# Altium PCB PCB1.PcbDoc
Units mm, origin at the board's own origin, x right, y up, seen from the top; angles counter-clockwise.
Board outline 45.67 x 59.21 mm, 2 copper layers (Top Layer, Bottom Layer); 30 components, 37 nets, 106 pads, 16 vias.
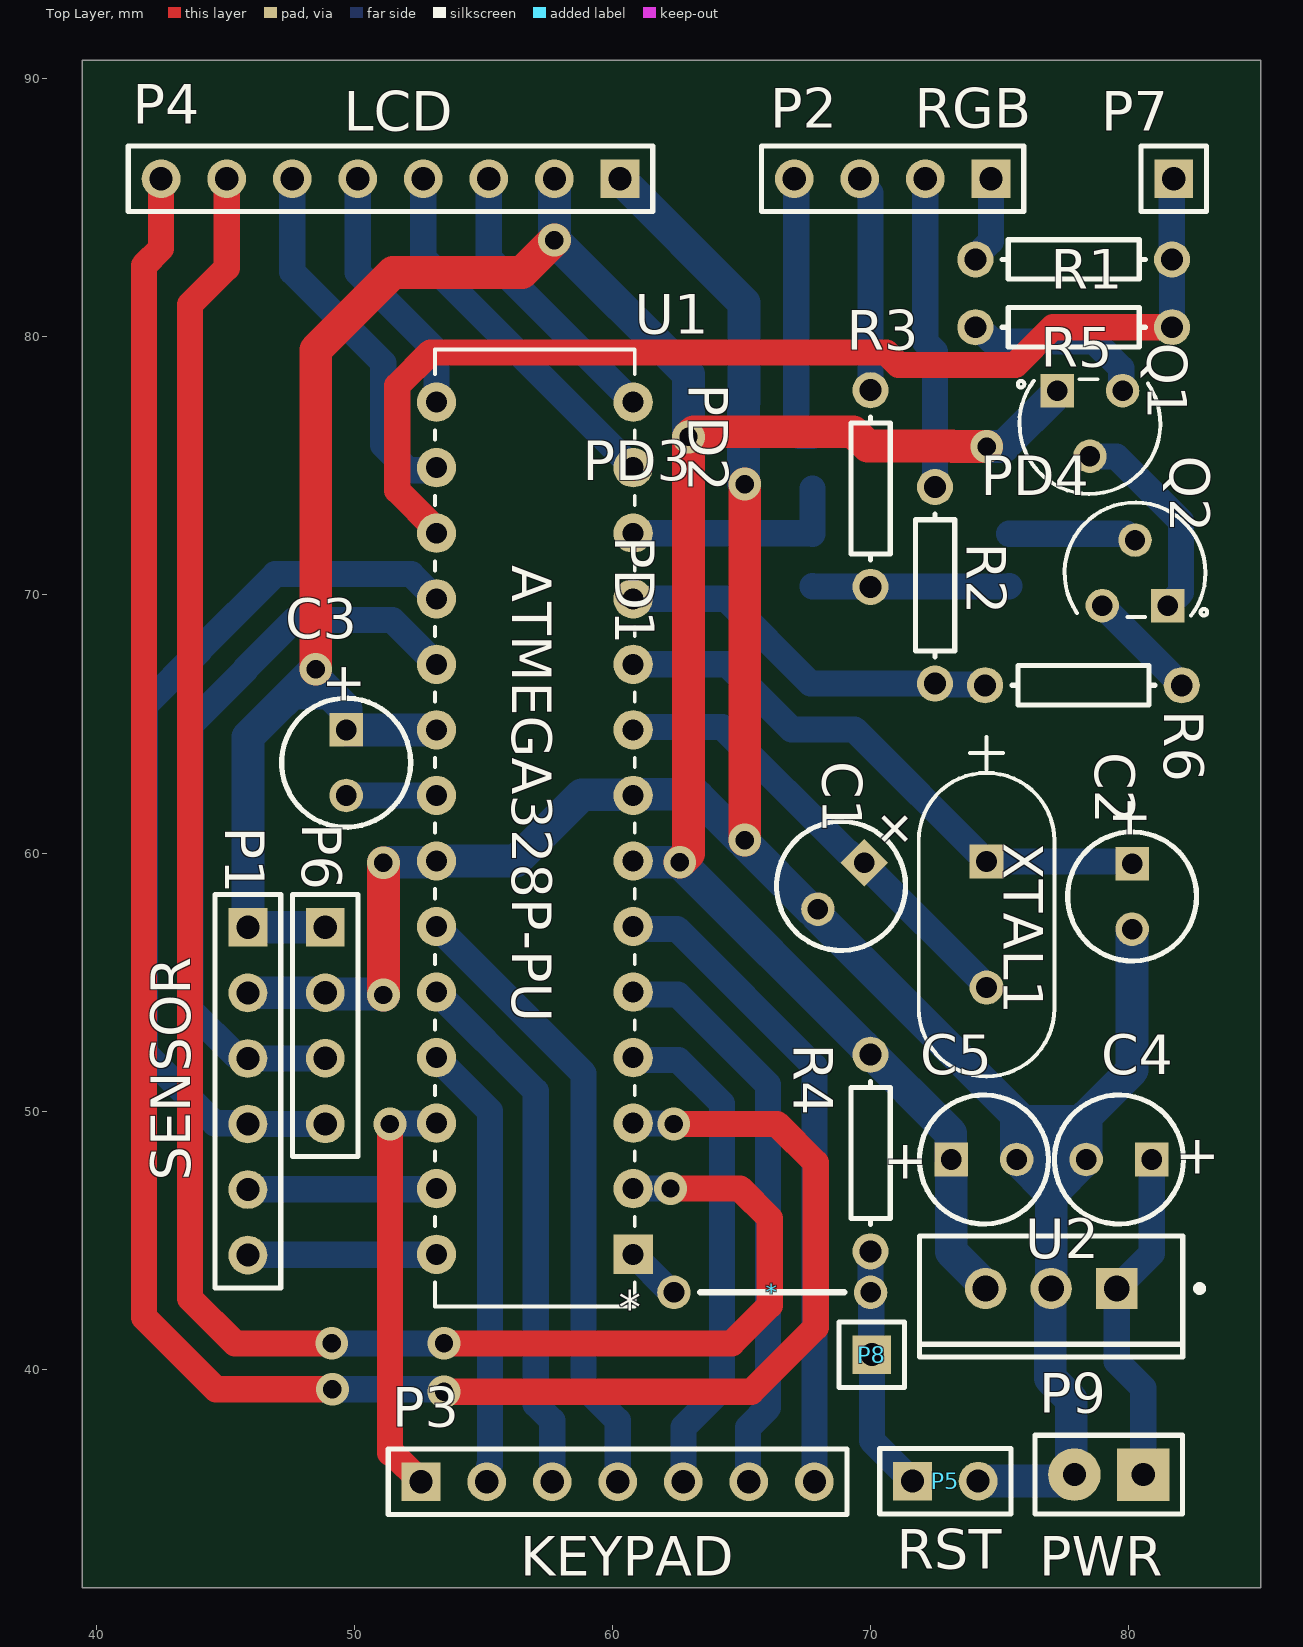
[diagram p0: Top Layer view]
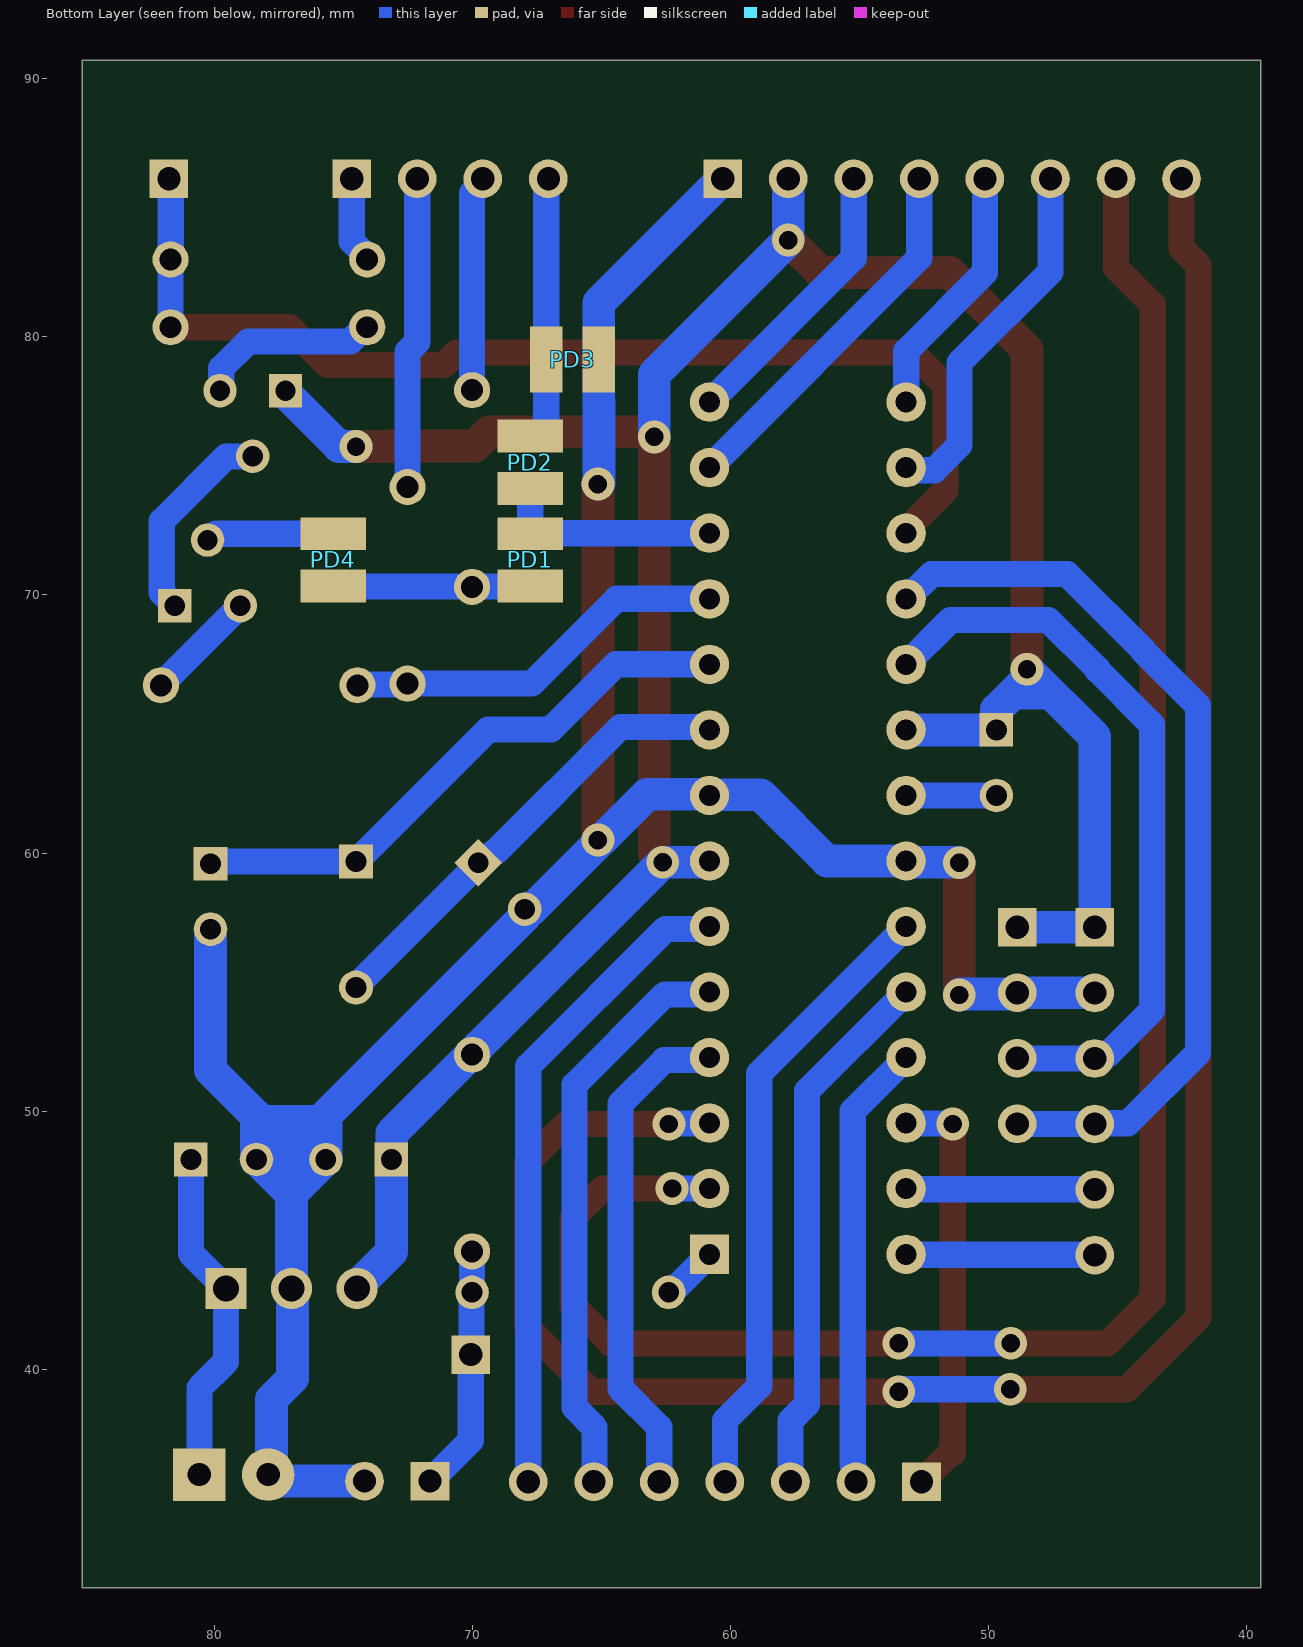
[diagram p1: Bottom Layer view, seen from below]
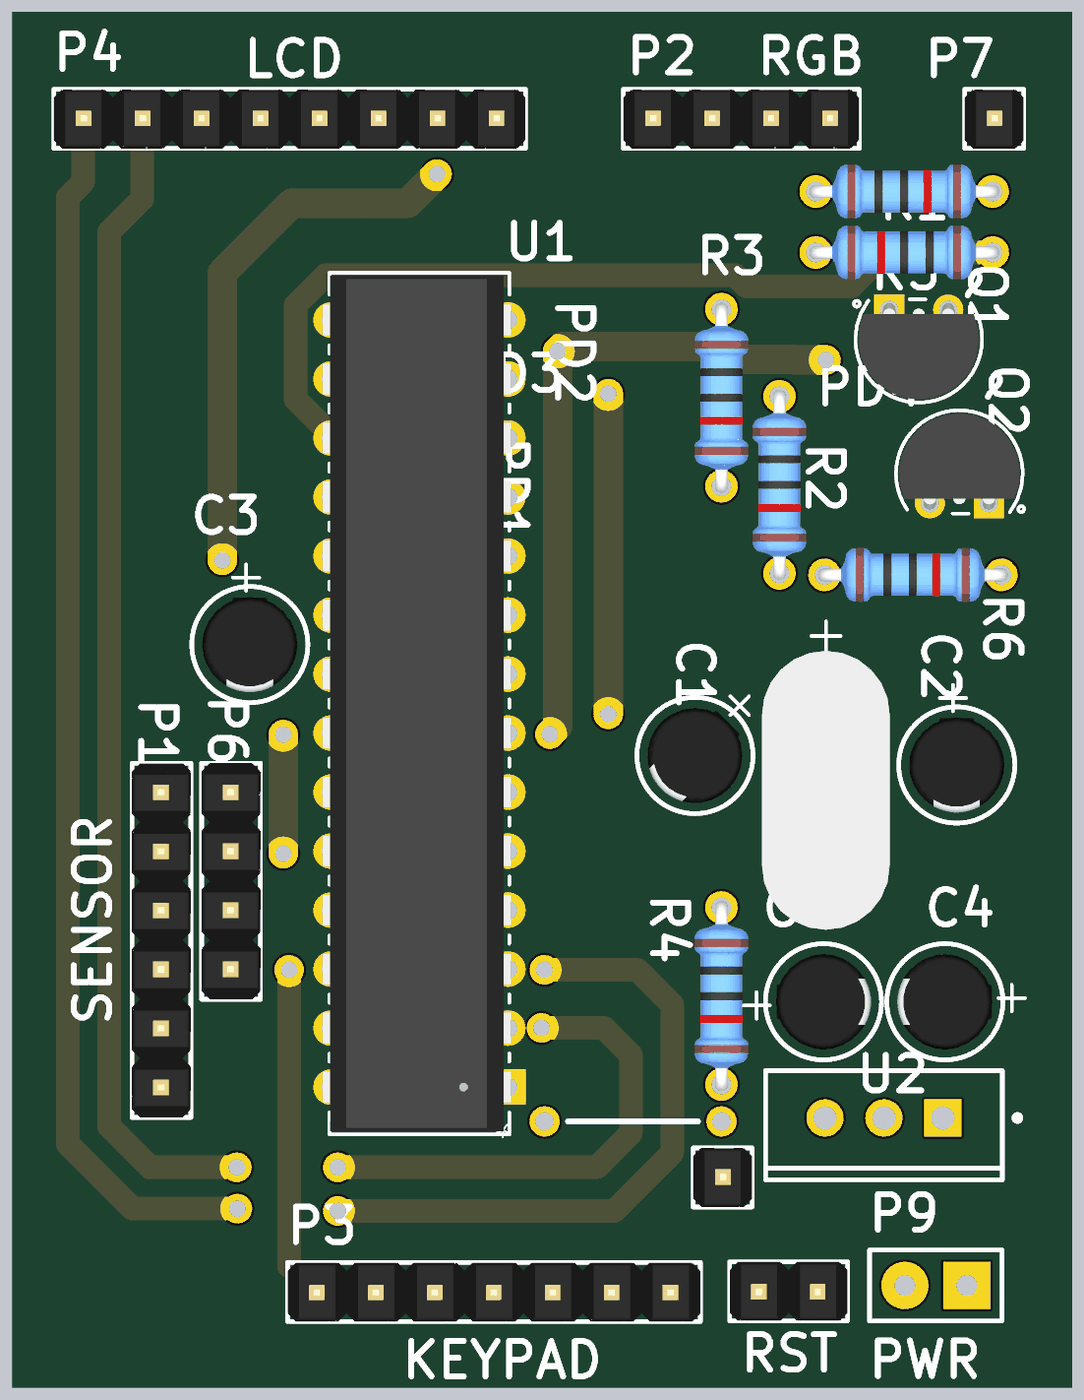
[diagram p2: 3D render of the assembled board from above, using the file's embedded part models]

## Layer stack, top to bottom
Top Solder: solder mask 0.0102, Solder Resist, Dk 3.5
Top Layer: signal copper 0.0356
Dielectric 1: dielectric 0.32, FR-4, Dk 4.8
Bottom Layer: signal copper 0.0356
Bottom Solder: solder mask 0.0102, Solder Resist, Dk 3.5

## Board outline
39.446,31.521 85.115,31.521 85.115,90.729 39.446,90.729

## Design rules (kind name [scope] priority, off if disabled: settings)
Clearance [All] p1: gap=0.254 ignorepadtopadclearanceinfootprint=FALSE except(0: Arc-Hole Track-Hole SMDPad-Hole THPad-Hole Via-Hole Fill-Hole Poly-Hole Region-Hole Text-Hole; 0.762: Arc-Arc Arc-Track Arc-Fill Arc-Poly Arc-Region Track-Track Track-Fill Track-Poly Track-Region)
PolygonConnect [All] p1: connectstyle=Relief reliefconductorwidth=0.254 reliefentries=4 polygonreliefangle="90 Angle" airgapwidth=0.254
RoomDefinition Sheet1 [InComponentClass('Sheet1')] p1 off: confinementstyle=ConfineIn formatcopy=TRUE lockcomponents=FALSE outline 39.243,31.42 85.217,31.42 85.217,90.729 39.243,90.729
RoutingVias [All] p1: holewidth=0.711 width=1.27 viastyle="Through Hole" minholewidth=0.711 minwidth=1.27 maxholewidth=0.711 maxwidth=1.27
SolderMaskExpansion [All] p1: expansion=0.102 istentingtop=FALSE
Width Width_POW [InNet('+5')  or InNet('GND')] p1: maxlimit=1.524 minlimit=0.762 preferedwidth=1.27 minimp=50.000000 maximp=50.000000 favimp=50.000000
Width [All] p2: maxlimit=1.524 minlimit=0.762 preferedwidth=1.016 minimp=50.000000 maximp=50.000000 favimp=50.000000
30 further rules are at their usual default settings.

## Components (designator, comment, footprint, x,y, rotation, side; value= is the part's Value field where it differs from the comment)
* "Jumper3" JUMPER3 66.192,42.977 r180 top
C1 "100pF" CAP1 68.859,58.725 r225 top
C2 "100pF" CAP1 80.137,58.318 r270 top
C3 "100pF" CAP1 49.682,63.5 r270 top
C4 "100pF" CAP1 79.625,48.125 r180 top
C5 "100pF" CAP1 74.395,48.125 r0 top
P1 "SENSOR" H6 45.875,57.12 r270 top
P2 "RGB" H4 74.665,86.125 r180 top
P3 "KEYPAD" H7 52.585,35.634 r0 top
P4 "LCD" H8 60.29,86.125 r180 top
P5 "RST" H2 71.628,35.662 r0 top
P6 "ISP1" H4 48.875,57.125 r270 top
P7 "ISP2" H1 81.75,86.125 r180 top
P8 "ISP3" H1 70.053,40.564 r180 top
P9 "PWR" H2_PWR 80.569,35.916 r180 top
PD1 "Pad2" PAD2 67.75,72.375 r270 top
PD2 "Pad2" PAD2 67.75,74.125 r90 top
PD3 "Pad2" PAD2 65.093,79.125 r0 top
PD4 "Pad2" PAD2 75.375,70.343 r90 top
Q1 "A733" TO-92_ONS 79.77,77.915 r180 top
Q2 "A733" TO-92_ONS 78.98,69.585 r0 top
R1 "220R" RES 77.875,83 r180 top
R2 "220R" RES 72.5,70.375 r90 top
R3 "220R" RES 70,74.125 r90 top
R4 "10K" RES 70,48.375 r90 top
R5 "1K" RES 77.875,80.375 r0 top
R6 "1K" RES 78.25,66.5 r180 top
U1 "ATMEGA328P-PU" 28P3_ATM 60.801,44.452 r180 top
U2 "LM7805CT" FAIR-TO-220-3 77,43.125 r270 top
XTAL1 "16MHz" XTAL_9B_TXC 74.498,59.668 r270 top

## Footprints (in the part's own frame and the unit in brackets; to place one, negate y for a bottom-side part, rotate by r counter-clockwise, add the part's x,y. Pads: shape width x height; smd on the part's side, far side on the other; paste and mask are expansions set on the pad)
28P3_ATM [mil]
  rect 60x60 hole 32 mask+0: 1(0,0)
  round 60 hole 32 mask+0: 2(0,-100) 3(0,-200) 4(0,-300) 5(0,-400) 6(0,-500) 7(0,-600) 8(0,-700) 9(0,-800) 10(0,-900) 11(0,-1000) 12(0,-1100) 13(0,-1200) 14(0,-1300) 15(300,-1300) 16(300,-1200) 17(300,-1100) 18(300,-1000) 19(300,-900) 20(300,-800) 21(300,-700) 22(300,-600) 23(300,-500) 24(300,-400) 25(300,-300) 26(300,-200) 27(300,-100) 28(300,0)
  silkscreen extent -3,-1380 303,80, body extent -5,-1375 314,75, height 205
CAP1 [mm] "THD, 2-Leads, Dia 5mm, Body Length 11mm"
  rect 1.3x1.3 hole 0.8: 1(-1.27,0)
  round 1.3 hole 0.8: 2(1.27,0)
  silkscreen extent -2.5,-2.5 2.5,2.5, body extent -2.05,-2.05 2.05,2.05, height 8.1
FAIR-TO-220-3 [mm] "FM, 3-Leads, Body 10.2x4.7mm, Pitch 2.54mm"
  rect 1.6x1.6 hole 1: 1(0,2.54)
  round 1.6 hole 1: 2(0,0) 3(0,-2.54)
  silkscreen extent -2.04,-5.1 2.66,5.88, body extent -2.04,-5.1 2.66,5.1, height 18.95
H1 [mm] "Connector; Header; 1 Position"
  rect 1.5x1.5 hole 0.9: 1(0,0)
  silkscreen extent -1.27,-1.27 1.27,1.27, body extent -1.27,-1.27 1.27,1.27, height 9.2
H2 [mm] "Connector; Header; 2 Position"
  rect 1.5x1.5 hole 0.9: 1(0,0)
  round 1.5 hole 0.9: 2(2.54,0)
  silkscreen extent -1.27,-1.27 3.81,1.27, body extent -1.27,-1.27 3.81,1.27, height 9.2
H2_PWR [mil] "Connector; Header; 2 Position"
  rect 80x80 hole 35.43: 1(0,0)
  round 80 hole 35.43: 2(105,0)
  silkscreen extent -60,-60 165,60
H4 [mm] "Connector; Header; 4 Position"
  rect 1.5x1.5 hole 0.9: 1(0,0)
  round 1.5 hole 0.9: 2(2.54,0) 3(5.08,0) 4(7.62,0)
  silkscreen extent -1.27,-1.27 8.89,1.27, body extent -1.27,-1.27 8.89,1.27, height 9.2
H6 [mm] "Connector; Header; 6 Position"
  rect 1.5x1.5 hole 0.9: 1(0,0)
  round 1.5 hole 0.9: 2(2.54,0) 3(5.08,0) 4(7.62,0) 5(10.16,0) 6(12.7,0)
  silkscreen extent -1.27,-1.27 13.97,1.27, body extent -1.27,-1.27 13.97,1.27, height 9.2
H7 [mm] "Connector; Header; 7 Position"
  rect 1.5x1.5 hole 0.9: 1(0,0)
  round 1.5 hole 0.9: 2(2.54,0) 3(5.08,0) 4(7.62,0) 5(10.16,0) 6(12.7,0) 7(15.24,0)
  silkscreen extent -1.27,-1.27 16.51,1.27, body extent -1.27,-1.27 16.51,1.27, height 9.2
H8 [mm] "Connector; Header; 8 Position"
  rect 1.5x1.5 hole 0.9: 1(0,0)
  round 1.5 hole 0.9: 2(2.54,0) 3(5.08,0) 4(7.62,0) 5(10.16,0) 6(12.7,0) 7(15.24,0) 8(17.78,0)
  silkscreen extent -1.27,-1.27 19.05,1.27, body extent -1.27,-1.27 19.05,1.27, height 9.2
JUMPER3 [mm]
  round 1.3 hole 0.8: 1(-3.81,0) 2(3.81,0)
  silkscreen extent -2.79,0 2.79,0
PAD2 [mil]
  rect 50x100 smd far side: 1(0,0) 2(80,0)
RES [mm] "Axial Device, Thru-Hole; 2 Leads; 0.3 in Pin Spacing"
  round 1.4 hole 0.85: 1(-3.81,0) 2(3.81,0)
  silkscreen extent -2.77,-0.76 2.77,0.76, body extent -4.08,-1.17 4.08,1.17, height 2.44
TO-92_ONS [mil]
  rect 51x51 hole 31 mask+0: 1(100,0)
  round 51 hole 31 mask+0: 2(50,100) 3(0,0)
  silkscreen extent -57,-17 160,157, body extent -52,-11 152,153, height 300
XTAL_9B_TXC [mil]
  rect 52x52 hole 32 mask+0: 1(0,0)
  round 52 hole 32 mask+0: 2(192.13,0)
  silkscreen extent -190,-104 328,104, body extent -140,-108 332,108, height 145

## Part data
C1 C2 C3 C4 C5: library part Cap1, "Capacitor", PackageDescription="Capacitor; 2 Leads", PackageReference=CAPR5-4X5, Published=23-Sep-2002, Publisher="Altium Limited"
P1: library part "Header 6", "Header, 6-Pin", LatestRevisionDate=17-Jul-2002, LatestRevisionNote="Re-released for DXP Platform.", Publisher="Altium Limited"
P2 P6: library part "Header 4", "Header, 4-Pin", LatestRevisionDate=17-Jul-2002, LatestRevisionNote="Re-released for DXP Platform.", Publisher="Altium Limited"
P3: library part "Header 7", "Header, 7-Pin", LatestRevisionDate=17-Jul-2002, LatestRevisionNote="Re-released for DXP Platform.", Publisher="Altium Limited"
P4: library part "Header 8", "Header, 8-Pin", LatestRevisionDate=17-Jul-2002, LatestRevisionNote="Re-released for DXP Platform.", Publisher="Altium Limited"
P5 P9: library part "Header 2", "Header, 2-Pin", LatestRevisionDate=17-Jul-2002, LatestRevisionNote="Re-released for DXP Platform.", Publisher="Altium Limited"
P7 P8: library part "Header 1", "Header, 1-Pin", LatestRevisionDate=17-Jul-2002, LatestRevisionNote="Re-released for DXP Platform.", Publisher="Altium Limited"
PD1 PD2 PD3 PD4: "Square Pad", h=10mil
Q1 Q2: "PNP General Purpose Transistor", ComponentLink1Description="Manufacturer Link", ComponentLink1URL=http://www.fairchildsemi.com/, ComponentLink2Description=Datasheet, ComponentLink2URL=http://www.fairchildsemi.com/ds/2N%2F2N3906.pdf, DatasheetVersion=1997, LatestRevisionDate=15-Jan-2003, LatestRevisionNote="PCB Footprint 'BCY-W3/D4.7' replaced", PackageDescription="TO, Flat Index; 3 In-Line, Axial Leads; Body Dia. 4.5mm; Leads 0.51 x 0.48 mm (max)", PackageReference=TO-92A, PackageVersion=Sep-1998, Published=8-Jun-2000, Publisher="Altium Limited"
R1 R2 R3 R4 R5 R6: library part Res1, "Resistor", LatestRevisionDate=17-Jul-2002, LatestRevisionNote="Re-released for DXP Platform.", PackageDescription="Axial Device, Thru-Hole; 2 Leads; 0.3 in Pin Spacing", PackageReference=AXIAL-0.3, Published=8-Jun-2000, Publisher="Altium Limited"
U1: "No Description Available", Built_By=EMA_UL_Team, Copyright="Copyright (C) 2018 Accelerated Designs. All rights reserved", Manufacturer_Part_Number=ATMEGA328P-PU, RefDes=RefDes, SourceLibrary=Atmel_2011-04-02, Type=DEV, Vendor=Atmel
U2: library part CMP-2000-04938-1, "Positive Voltage Regulator, 5 V, 1 A, -40 to 125 degC, 3-Pin TO-220, RoHS, Tube", Manufacturer=FairchildSemiconductor, Maximum Input Voltage=35V, Maximum Output Current=2.2(Typ)A, Maximum Quiescent Current=8mA, Operating Temperature=-40to125degC, Output Voltage=5V, Package=3TO-220AB, Package Description="3-Pin Through Hole Device, Body 10 x 4.5 mm, Pitch 2.54 mm", Package Reference=TO-220, Typical Dropout Voltage @ Current=2@1AV, Accuracy=±4%, Category=LinearRegulator, Datasheet URL=https://datasheet.ciiva.com/26904/lm7805ct-26904988.pdf, Datasheet Version=Aug-12, Line Regulation=100mV, Load Regulation=100mV, Manufacturer URL=https://www.fairchildsemi.com/, Mounting=ThroughHole, Number of Outputs=1, Output Type=Fixed, Package URL=https://www.fairchildsemi.com/package-drawings/TO/TO220B03.pdf, Packaging=Rail/Tube, Polarity=Positive, Rad Hard=No, Type=Linear
XTAL1: library part 9B-11.0592MAAJ-B, "No Description Available", Built_By=EMA_Cory, Copyright="Copyright (C) 2018 Accelerated Designs. All rights reserved", Datasheet=http://www.txccrystal.com/images/pdf/9b.pdf, Manufacturer_Part_Number=9B-11.0592MAAJ-B, RefDes=RefDes, SourceLibrary=TXC_2020-02-10, Type=DEV, Vendor=TXC

## Via types
v1: diameter 1.27, hole 0.711, Top Layer to Bottom Layer, 16 vias

## Nets (pads, with @x,y where several pads share a name; then routed paths per layer and width w, separated by ;. In a path a pad name is that pad's centre, name@x,y a point inside that pad or via, vN(x,y) a via of type N, cw(c..) or ccw(c..) an arc to the next point about the centre after c; other vN are vias at no path point)
+5: C3.1 C5.1 P1.1 P4.2 P6.1 Q1.1 R4.2 U1.7 U1.20 U2.3 | length 111.4
  Top Layer w1.27: v1(48.5,67.125) 48.5,79.5 51.5,82.5 56.5,82.5 v1(57.75,83.75) ; v1(62.611,59.643) 62.944,59.977 v1(62.944,76.125) 63.148,76.329 69.334,76.329 69.889,75.774 73.159,75.774 73.183,75.75 v1(74.5,75.75)
  Bottom Layer w1.27: P6.1 48.872,57.122 45.877,57.122 P1.1 45.875,64.5 v1(48.5,67.125) 48.5,66.74 49.682,65.557 C3.1 C3.1 53.18,64.771 U1.20 ; P4.2 v1(57.75,83.75) 62.944,78.556 v1(62.944,76.125) ; U1.7 60.85,59.643 v1(62.611,59.643) 69.73,52.524 73.11,49.144 73.11,48.14 C5.1 73.125,44.549 74.46,43.214 U2.3 ; v1(74.5,75.75) 75.156,75.75 77.23,77.824 Q1.1
GND: C1.2 C2.2 C4.2 C5.2 P1.2 P4.1 P5.2 P6.2 P9.2 PD3.1 U1.8 U1.22 U2.2 | length 99.3
  Top Layer w1.27: P1.2 P1.2@45.919,54.624 ; P6.2 P6.2@48.891,54.569 ; v1(51.125,54.5) v1(51.125,59.625) ; v1(65.125,60.5) v1(65.125,74.297)
  Bottom Layer w1.27: P1.2 45.877,54.582 48.872,54.582 P6.2 48.919,54.541 51.084,54.541 v1(51.125,54.5) ; v1(51.125,59.625) 51.143,59.643 53.132,59.643 U1.22 56.25,59.692 58.813,62.255 60.778,62.255 U1.8 ; P4.1 65.093,81.322 PD3.1 65.093,77.472 65.083,77.462 65.083,74.339 v1(65.125,74.297) ; U1.8@60.85,62.281 63.219,62.281 63.314,62.186 v1@65,60.5 ; v1(65.125,60.5) 65.125,60.375 67.667,57.833 67.956,57.833 67.967,57.821 67.967,57.533 75.659,49.841 75.659,48.131 C5.2 75.673,48.125 77,46.798 ; P5.2 77.442,35.662 77.696,35.916 P9.2 77.775,36.043 77.775,38.837 76.962,39.649 76.962,43.087 U2.2 77,46.798 ; C2.2 80.137,51.587 78.355,49.805 C4.2 78.347,48.125 77.02,46.798 77,46.798
Net*_1: *.1 P5.1 P8.1 R4.1 | length 9.6
  Bottom Layer w1.016: R4.1 70.001,44.564 *.1 *.1 70.028,42.951 70.028,40.589 P8.1 70.053,37.236 P5.1
Net*_2: *.2 U1.1 | length 2.2
  Bottom Layer w1.016: U1.1 62.222,43.031 62.328,43.031 *.2
NetC1_1: C1.1 U1.9 XTAL1.2 | length 18
  Bottom Layer w1.016: U1.9 60.898,64.869 61.257,64.869 61.268,64.879 64.254,64.879 69.113,60.021 69.159,60.021 69.557,59.623 C1.1 69.757,59.576 74.498,54.835 XTAL1.2
NetC2_1: C2.1 U1.10 XTAL1.1 | length 22.5
  Bottom Layer w1.016: U1.10 64.424,67.312 66.949,64.787 69.379,64.787 XTAL1.1 80.058,59.668 C2.1
NetC3_2: C3.2 U1.21 | length 3.5
  Bottom Layer w1.016: C3.2 C3.2 53.18,62.231 U1.21
NetC4_1: C4.1 P9.1 U2.1 | length 13.2
  Bottom Layer w1.016: P9.1 80.569,39.268 79.54,40.297 U2.1 80.895,44.48 C4.1
NetP1_3: P1.3 P6.3 U1.19 | length 29.2
  Top Layer w1.016: P1.3 P1.3@45.877,52.042 ; P6.3@48.651,52.042 48.654,52.045 P6.3
  Bottom Layer w1.016: P6.3 48.872,52.042 45.877,52.042 P1.3 45.782,52.133 45.433,52.133 43.653,53.912 43.653,64.972 45.778,67.097 45.778,67.139 47.669,69.03 51.463,69.03 U1.19
NetP1_4: P1.4 P6.4 U1.18 | length 35.7
  Top Layer w1.016: P1.4 P1.4@45.877,49.502 ; P6.4@48.651,49.502 48.654,49.505 P6.4
  Bottom Layer w1.016: P6.4 48.872,49.502 45.877,49.502 P1.4 45.843,49.532 44.593,49.532 41.875,52.25 41.875,65.709 44,67.834 44,67.875 46.933,70.808 52.199,70.808 53.155,69.852 U1.18
NetP1_5: P1.5 U1.27 | length 7.3
  Bottom Layer w1.016: P1.5 45.891,46.976 52.946,46.976 52.962,46.992 U1.27
NetP1_6: P1.6 U1.28 | length 7.3
  Bottom Layer w1.016: P1.6 45.891,44.436 52.946,44.436 52.962,44.452 U1.28
NetP2_1: P2.1 R1.2 | length 3.4
  Bottom Layer w1.016: R1.2 74.065,83.104 74.665,83.704 P2.1
NetP2_2: P2.2 R2.2 | length 12.1
  Bottom Layer w1.016: P2.2 72.125,79.801 72.5,79.426 R2.2
NetP2_3: P2.3 R3.2 | length 8.4
  Bottom Layer w1.016: P2.3 69.585,85.994 70,85.579 R3.2
NetP2_4: P2.4 PD2.2 PD3.2 | length 10.6
  Bottom Layer w1.016: P2.4 67.125,86.045 67.125,76.284 67.252,76.157 PD2.2
NetP3_1: P3.1 U1.26 | length 16.2
  Top Layer w1.016: v1(51.375,49.5) 51.375,36.75 51.469,36.75 P3.1
  Bottom Layer w1.016: v1(51.375,49.5) 51.391,49.516 53.165,49.516 U1.26
NetP3_2: P3.2 U1.25 | length 17.3
  Bottom Layer w1.016: U1.25 55.25,50.003 55.25,36.282 55.218,36.25 55.218,35.727 P3.2
NetP3_3: P3.3 U1.24 | length 20.8
  Bottom Layer w1.016: U1.24 57.028,50.765 57.028,38.643 57.665,38.006 P3.3
NetP3_4: P3.4 U1.23 | length 24.4
  Bottom Layer w1.016: U1.23 58.875,51.458 58.875,39.336 60.205,38.006 P3.4
NetP3_5: P3.5 U1.4 | length 19.5
  Bottom Layer w1.016: U1.4 60.898,51.975 62.556,51.975 64.25,50.281 64.25,39.25 62.75,37.75 62.75,35.639 P3.5
NetP3_6: P3.6 U1.5 | length 22.4
  Bottom Layer w1.016: U1.5 60.898,54.515 62.531,54.515 66.028,51.018 66.028,38.514 65.257,37.743 65.257,35.662 P3.6
NetP3_7: P3.7 U1.6 | length 25.4
  Bottom Layer w1.016: U1.6 60.898,57.055 62.505,57.055 67.825,51.735 P3.7
NetP4_3: P4.3 U1.14 | length 11
  Bottom Layer w1.016: P4.3 55.21,83.063 U1.14
NetP4_4: P4.4 U1.13 | length 14.6
  Bottom Layer w1.016: P4.4 52.67,83.063 U1.13
NetP4_5: P4.5 U1.15 | length 9.9
  Bottom Layer w1.016: P4.5 50.13,82.495 53.181,79.444 U1.15
NetP4_6: P4.6 U1.16 | length 14.3
  Bottom Layer w1.016: P4.6 47.59,82.521 51.118,78.993 51.118,75.807 52.09,74.835 53.084,74.835 U1.16
NetP4_7: P4.7 U1.2 | length 76.9
  Top Layer w1.016: P4.7 45.05,82.675 43.625,81.25 43.625,42.75 45.375,41 v1(49.125,41) ; v1(53.472,41) 64.625,41 66.097,42.472 66.097,45.842 64.939,47 v1(62.25,47)
  Bottom Layer w1.016: v1(49.125,41) v1(53.472,41) ; U1.2 60.805,46.996 62.246,46.996 v1(62.25,47)
NetP4_8: P4.8 U1.3 | length 86.7
  Top Layer w1.016: P4.8 42.51,83.43 41.847,82.767 41.847,42.014 44.639,39.222 v1(49.149,39.222) ; v1(53.472,39.125) 65.375,39.125 67.875,41.625 67.875,48 66.375,49.5 v1(62.375,49.5)
  Bottom Layer w1.016: v1(49.149,39.222) 53.306,39.222 53.403,39.125 v1(53.472,39.125) ; U1.3 60.817,49.516 62.359,49.516 v1(62.375,49.5)
NetP7_1: P7.1 R1.1 R5.2 U1.17 | length 43.5
  Top Layer w1.016: U1.17 53.181,72.529 51.657,74.053 51.657,78.103 52.951,79.397 70.606,79.397 71.09,78.913 75.604,78.913 77.066,80.375 R5.2
  Bottom Layer w1.016: R5.2 81.685,83.167 81.675,83.177 81.675,86.05 P7.1
NetPD1_1: PD1.1 PD2.1 U1.12 | length 8.7
  Bottom Layer w1.016: U1.12 67.733,72.392 PD1.1 PD2.1
NetPD1_2: PD1.2 PD4.1 R3.1 | length 7.6
  Bottom Layer w1.016: PD1.2 67.764,70.329 69.986,70.329 R3.1 70.014,70.329 75.361,70.329 PD4.1
NetPD4_2: PD4.2 Q2.2 | length 5
  Bottom Layer w1.016: PD4.2 79.924,72.375 80.174,72.125 Q2.2
NetQ1_2: Q1.2 Q2.1 | length 8.1
  Bottom Layer w1.016: Q1.2 78.512,75.363 79.527,75.363 82.028,72.861 82.028,70.093 Q2.1
NetQ1_3: Q1.3 R5.1 | length 7.2
  Bottom Layer w1.016: R5.1 74.169,80.375 74.724,79.82 78.68,79.82 79.717,78.783 79.717,77.968 Q1.3
NetQ2_3: Q2.3 R6.1 | length 4.4
  Bottom Layer w1.016: Q2.3 78.98,69.582 82.06,66.502 R6.1
NetR2_1: R2.1 R6.2 U1.11 | length 14.9
  Bottom Layer w1.016: U1.11@60.913,69.843 60.922,69.852 64.398,69.852 67.685,66.565 R2.1 72.532,66.533 74.408,66.533 R6.2

## Other copper
Bottom Layer:
  rectangle net +5: 47.701,65.557 48.819,66.142
  rectangle net GND: 76.149,48.616 77.902,50.241
  region net GND: 75.839,48.844 78.322,48.844 77.064,47.585

## Text inside footprints (layer, text, board x,y; h text height)
C1: Top Overlay "+" at 71.102,62.009 h1.5 r225
C2: Top Overlay "+" at 79.4,62.226 h1.5 r270
C3: Top Overlay "+" at 48.945,67.408 h1.5 r270
C4: Top Overlay "+" at 83.533,48.862 h1.5 r180
C5: Top Overlay "+" at 70.487,47.388 h1.5
Q1: Mechanical 7 "Pinout: 1, 2, 3" at 83.263,83.897 h1.27 r180; Mechanical 7 "Default Padstyle: EX51Y51D31P" at 87.708,85.421 h1.27 r180; Mechanical 7 "Pin 1 Padstyle: SX51Y51D31P" at 87.073,86.945 h1.27 r180; Mechanical 7 "Alt 1 Padstyle: OX60Y90D30P" at 87.073,88.469 h1.27 r180; Mechanical 7 "Alt 2 Padstyle: OX90Y60D30P" at 87.073,89.993 h1.27 r180; Mechanical 7 "0.205in/5.207mm" at 80.881,72.264 h0.64 r180; Mechanical 7 "0.1in/2.54mm" at 74.119,76.963 h0.64 r180; Mechanical 7 "0.1in/2.54mm" at 80.405,81.414 h0.64 r180; Mechanical 7 "0.165in/4.191mm" at 87.644,76.963 h0.64 r180
Q2: Mechanical 7 "Pinout: 1, 2, 3" at 75.487,63.603 h1.27; Mechanical 7 "Default Padstyle: EX51Y51D31P" at 71.042,62.079 h1.27; Mechanical 7 "Pin 1 Padstyle: SX51Y51D31P" at 71.677,60.555 h1.27; Mechanical 7 "Alt 1 Padstyle: OX60Y90D30P" at 71.677,59.031 h1.27; Mechanical 7 "Alt 2 Padstyle: OX90Y60D30P" at 71.677,57.507 h1.27; Mechanical 7 "0.205in/5.207mm" at 77.869,75.236 h0.64; Mechanical 7 "0.1in/2.54mm" at 84.631,70.537 h0.64; Mechanical 7 "0.1in/2.54mm" at 78.345,66.086 h0.64; Mechanical 7 "0.165in/4.191mm" at 71.106,70.537 h0.64
U1: Top Overlay "*" at 61.119,43.563 h1.27 r180; Mechanical 7 "Default Padstyle: EX60Y60D32P" at 66.199,84.584 h1.27 r180; Mechanical 7 "Pin 1 Padstyle: SX60Y60D32P" at 65.564,87.124 h1.27 r180; Mechanical 7 "Alt 1 Padstyle: OX60Y90D30P" at 65.564,88.394 h1.27 r180; Mechanical 7 "Alt 2 Padstyle: OX90Y60D30P" at 65.564,89.664 h1.27 r180; Mechanical 7 "0.1in/2.54mm" at 67.659,46.04 h0.64 r180; Mechanical 7 "0.3in/7.62mm" at 58.896,81.155 h0.64 r180; Mechanical 7 "0.295in/7.493mm" at 59.372,41.404 h0.64 r180; Mechanical 7 "1.45in/36.83mm" at 50.133,61.28 h0.64 r180; Mechanical 13 "*" at 60.801,45.087 h1.27 r180
XTAL1: Mechanical 7 "0.453in/11.506mm" at 78.778,59.768 h0.64 r270; Mechanical 7 "0.192126in/4.88mm" at 69.583,59.927 h0.64 r270; Mechanical 7 "0.197in/5.004mm" at 74.181,49.697 h0.64 r270; Mechanical 7 "Alt 2 Pad Style: OX90Y60D30P" at 61.201,66.118 h1.27 r270; Mechanical 7 "Alt 1 Pad Style: OX60Y90D30P" at 63.106,66.118 h1.27 r270; Mechanical 7 "Default Pad Style: EX52Y52D32P" at 65.011,66.753 h1.27 r270; Mechanical 7 "Pin 1 Pad Style: SX52Y52D32P" at 66.916,66.118 h1.27 r270